# Altium PCB PCB1.PcbDoc (part 2 of 2)
Units mm, origin at the board's own origin, x right, y up, seen from the top; angles counter-clockwise.
Board outline 68.25 x 71.75 mm, 4 copper layers (Top Layer, Int1 (GND), Int2 (PWR), Bottom Layer), stack 1.369 mm thick; 58 components, 47 nets, 216 pads, 101 vias.
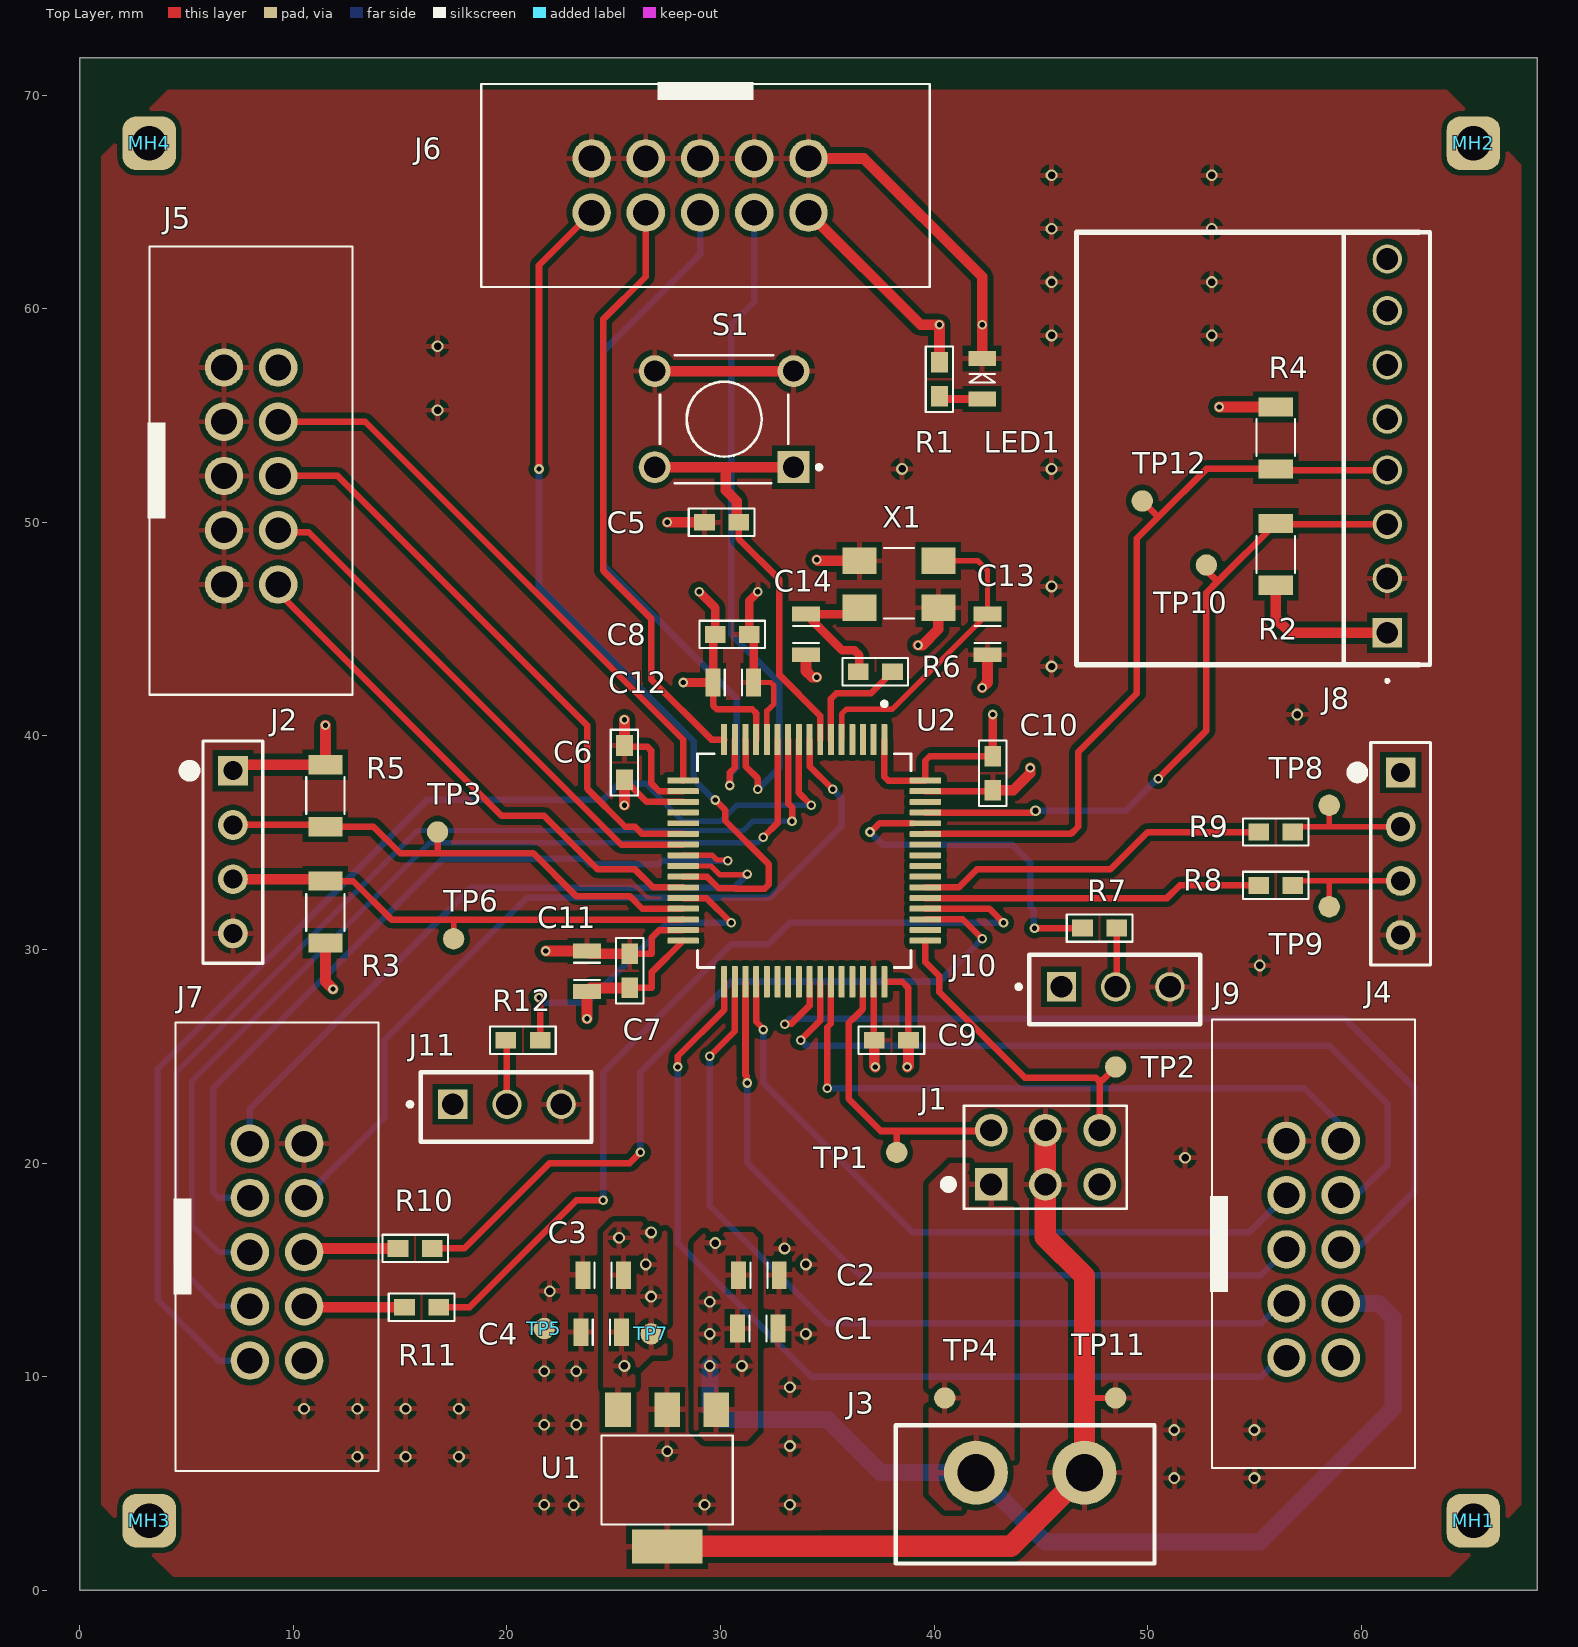
[diagram p0: Top Layer view]

## Polygon pours and split planes (outlines as drawn) (continued)
GND on Top Layer "GND_L01_P001" (solid, pour order 1): 34.75,17 32.5,17 32.25,16.75 32.25,6.25 31.5,5.5 28.5,5.5 28.5,9.5 28,10 27,10 26.5,9.5 26.5,9 26.5,5.5 24.5,5.5 24.25,5.75 24.25,15.5 24,15.75 23,15.75 20.75,13.5 20.75,1.25 21,1 33,1 34.75,2.75
+3V3 on Top Layer "+3V3_L01_P003" (solid, pour order 3): 25,17.25 27,17.25 27.5,16.75 27.5,11 26.75,11 26,10.25 26,7.5 25.75,7.25 24.75,7.25 24.5,7.5 24.5,16.75
+5V on Top Layer "+5V_L01_P000" (solid, pour order 0): 29.25,16.75 31.5,16.75 31.75,16.5 31.75,7.5 31.25,7 29.25,7 28.75,7.5 28.75,16.25
GND on Bottom Layer "GND_L04_P011" (solid, remove dead copper, pour order 11): 63.887,70.25 4,70.25 0.887,67.137 0.887,4 4.25,0.637 64.023,0.637 67.387,4 67.387,66.75
+3V3 on Int2 (PWR) (split plane): 67.74,0.51 0.51,0.51 0.51,71.24 67.74,71.24
+5V on Int2 (PWR) (split plane): 62.621,7.554 61.158,6.092 56.446,1.379 35.804,1.379 33.842,3.342 33.8,3.37 33.75,3.379 12.554,3.379 6.879,9.054 6.879,11.446 7.304,11.871 23.371,11.871 23.371,7.75 23.38,7.7 23.408,7.658 23.908,7.158 23.95,7.13 24,7.121 27.75,7.121 27.8,7.13 27.842,7.158 28.592,7.908 28.62,7.95 28.629,8 28.629,16.871 39.75,16.871 39.8,16.88 39.842,16.908 39.87,16.95 39.879,17 39.879,17.696 42.054,19.871 43.446,19.871 43.871,19.446 43.871,7.25 43.88,7.2 43.908,7.158 43.95,7.13 44,7.121 59.25,7.121 59.3,7.13 59.342,7.158 59.592,7.408 61.092,8.908 61.12,8.95 61.129,9 61.129,11.75 61.12,11.8 61.092,11.842 60.342,12.592 60.3,12.62 60.25,12.629 58.129,12.629 58.129,22.196 59.342,23.408 59.37,23.45 59.379,23.5 59.379,38.446 60.554,39.621 62.621,39.621
GND on Int1 (GND) (split plane): 67.74,0.51 0.51,0.51 0.51,71.24 67.74,71.24

## Other copper
Int2 (PWR) (plane layer: these items are gaps in the copper):
  lines w0.254: 6.75,9 6.75,11.5 7.25,12 23.5,12 23.5,7.75 24,7.25 27.75,7.25 28.5,8 28.5,17 38.75,17 39.75,17 39.75,17.75 42,20 43.5,20 44,19.5 44,7.25 56,7.25 59.25,7.25 59.5,7.5 61,9 61,11.75 60.25,12.5 58,12.5 58,22.25 59.25,23.5 59.25,38.5 60.5,39.75 62.75,39.75 62.75,7.5 61.25,6 56.5,1.25 43.75,1.25 35.75,1.25 33.75,3.25 12.5,3.25 6.75,9

## Silkscreen, mask and mechanical layers (free items; w line width, h text height)
Top Overlay:
  lines w0.254: 62.696,43.33 46.669,43.33 46.669,63.58 62.696,63.58
Bottom Overlay:
  drawing of 2413 lines, arcs and shapes, not listed
  text "GND" at 39.1,66.65 h1
  text "I2" at 24.6,61.4 h1
  text "M4" at 27.1,61.4 h1
  text "M5" at 29.85,61.4 h1
  text "M6" at 32.35,61.4 h1
  text "3V3" at 36.1,61.4 h1
  text "IMU" at 66.35,61.4 h1
  text "GND" at 7.6,59.4 h1
  text "3V3" at 13.85,56.9 h1
  text "M3" at 12.85,54.15 h1
  text "M2" at 12.85,51.65 h1
  text "SDA" at 67.1,51.65 h1
  text "M1" at 12.85,49.15 h1
  text "SCL" at 66.85,49.15 h1
  text "I1" at 12.85,46.9 h1
  text "GND" at 67.1,46.65 h1
  text "3V3" at 67.1,43.9 h1
  text "3V3" at 5.35,37.9 h1
  text "5V" at 66.6,37.65 h1
  text "SCL" at 5.35,35.15 h1
  text "RX" at 66.35,34.9 h1
  text "SDA" at 5.35,32.4 h1
  text "TX" at 66.35,32.4 h1
  text "PRESSURE SENSOR" at 21.5,31.5 h1
  text "3V3" at 47.1,30.15 h1
  text "GND" at 52.6,30.15 h1
  text "GND" at 66.35,30.15 h1
  text "-" at 5.1,29.9 h1
  text "BOOT0" at 50.85,25.15 h1
  text "3V3" at 18.35,24.65 h1
  text "GND" at 24.35,24.65 h1
  text "-" at 45.6,22.9 h1
  text "CLK" at 52.1,21.65 h1
  text "DIO" at 40.85,21.4 h1
  text "-" at 13.35,20.4 h1
  text "PC5" at 6.1,20.15 h1
  text "-" at 54.85,20.15 h1
  text "RX" at 65.85,20.15 h1
  text "BOOT1" at 22.1,19.4 h1
  text "5V" at 40.6,18.4 h1
  text "PC0" at 14.85,17.9 h1
  text "3V3" at 54.6,17.9 h1
  text "PC4" at 6.1,17.4 h1
  text "TX" at 65.85,17.4 h1
  text "-" at 45.6,16.9 h1
  text "TX" at 14.35,15.4 h1
  text "MISO" at 54.85,15.15 h1
  text "CK" at 65.6,15.15 h1
  text "PC3" at 6.1,14.9 h1
  text "PROG." at 46.85,14.65 h1
  text "RX" at 14.1,12.9 h1
  text "SCK" at 54.6,12.65 h1
  text "5V" at 65.6,12.65 h1
  text "PC2" at 6.1,12.4 h1
  text "5V" at 14.1,10.15 h1
  text "NSS" at 54.85,10.15 h1
  text "PC1" at 6.1,9.9 h1
  text "3V3" at 65.6,9.9 h1
  text "5V" at 42.6,1.9 h1
  text "GND" at 48.6,1.9 h1